# Altium PCB PCB_v1.0.PcbDoc
Units mil, origin at the board's own origin, x right, y up, seen from the top; angles counter-clockwise.
Board outline 3387.01 x 1775 mil, 2 copper layers (Top Layer, Bottom Layer); 30 components, 23 nets, 91 pads, 2 vias.
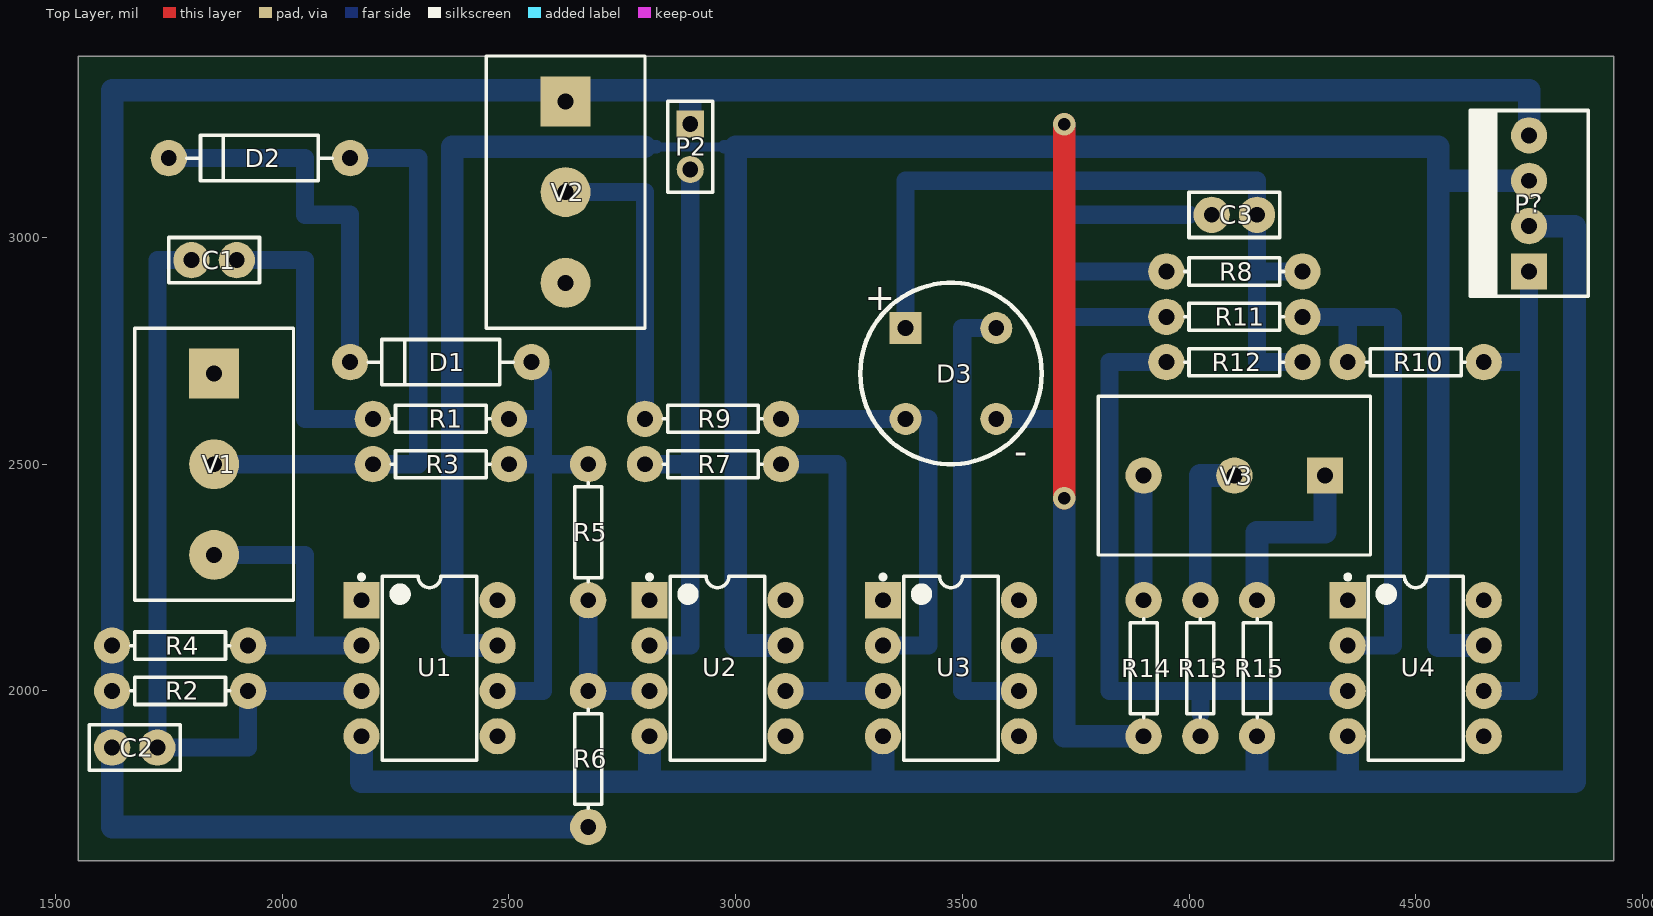
[diagram p0: Top Layer view]
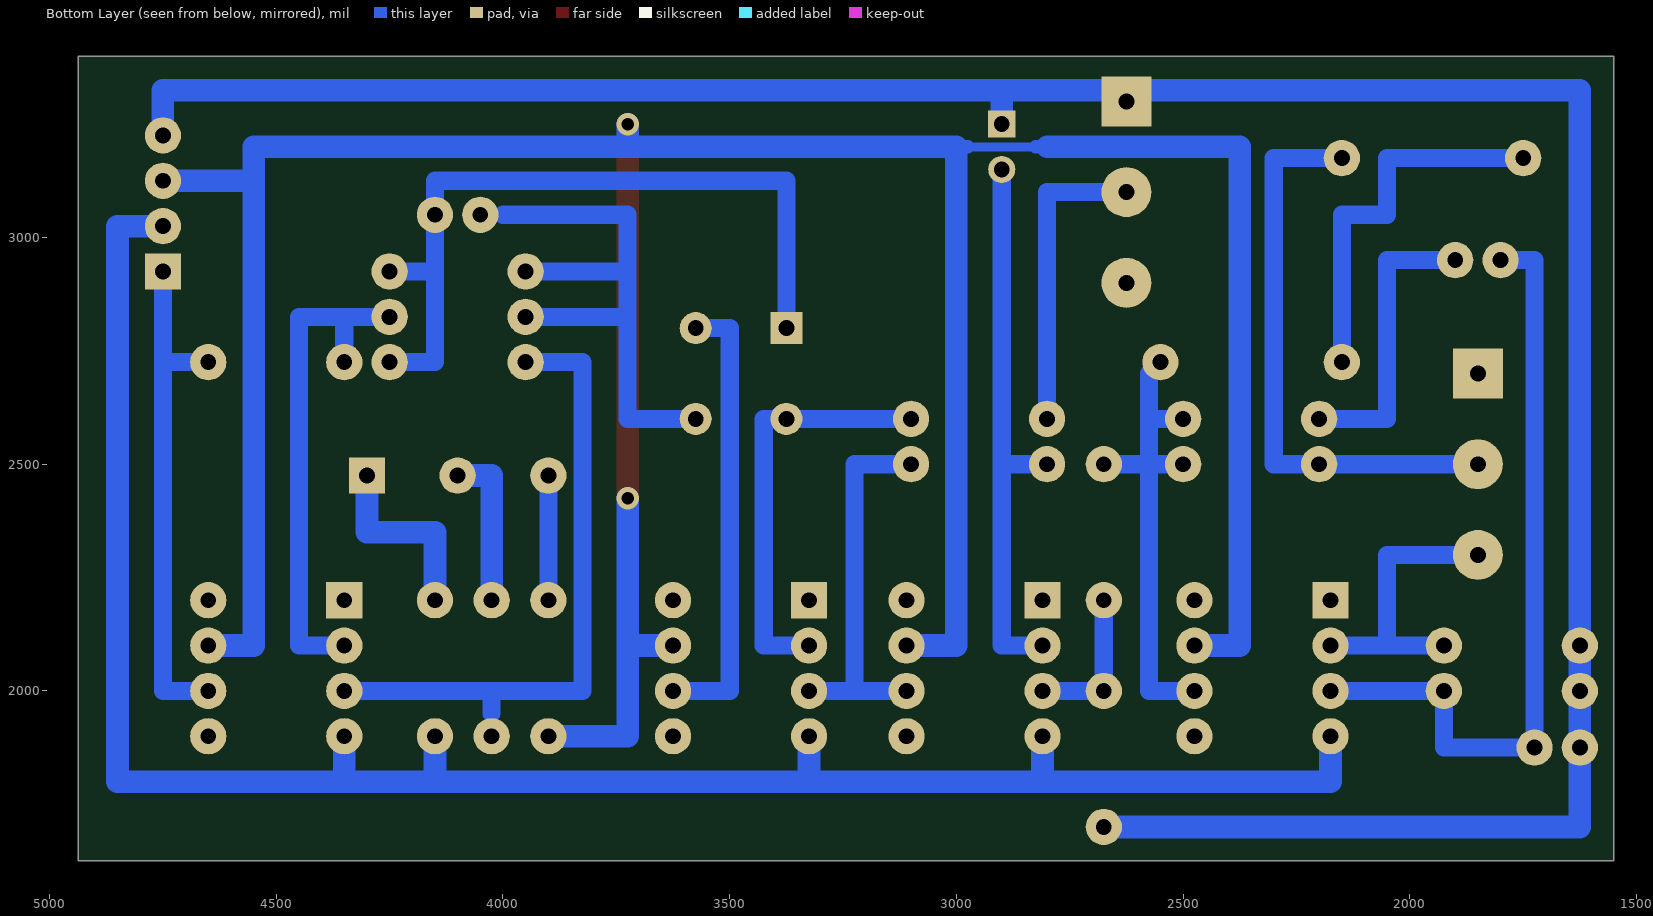
[diagram p1: Bottom Layer view, seen from below]

## Layer stack, top to bottom
Top Solder: solder mask 0.4, Solder Resist, Dk 3.5
Top Layer: signal copper 1.4
Dielectric 1: dielectric 12.6, FR-4, Dk 4.8
Bottom Layer: signal copper 1.4
Bottom Solder: solder mask 0.4, Solder Resist, Dk 3.5

## Board outline
1550,1625 4937.01,1625 4937.01,3400 1550,3400

## Design rules (kind name [scope] priority, off if disabled: settings)
Clearance [All] p1: gap=10 ignorepadtopadclearanceinfootprint=FALSE except(0: Arc-Hole Track-Hole SMDPad-Hole THPad-Hole Via-Hole Fill-Hole Poly-Hole Region-Hole Text-Hole)
PolygonConnect [All] p1: connectstyle=Relief reliefconductorwidth=10 reliefentries=4 polygonreliefangle="90 Angle" airgapwidth=10
RoutingVias [All] p1: holewidth=28 width=50 viastyle="Through Hole" minholewidth=28 minwidth=50 maxholewidth=28 maxwidth=50
SolderMaskExpansion [All] p1: expansion=4
Width [All] p1: maxlimit=80 minlimit=10 preferedwidth=30
30 further rules are at their usual default settings.

## Components (designator, comment, footprint, x,y, rotation, side; value= is the part's Value field where it differs from the comment)
C1 "0.015uF" RAD-0.1 1850,2950 r0 top
C2 "Cap" RAD-0.1 1675,1875 r180 top value=0.015uF
C3 "Cap" RAD-0.1 4100,3050 r0 top value=0.22uF
D1 "1N4733" DIODE-0.4 2350,2725 r180 top
D2 "1N4733" DIODE-0.4 1950,3175 r180 top
D3 "Bridge" BRIDGE_W 3475,2700 r0 top
P2 "Sonda" HDR1X2 2900,3250 r270 top
P? "Header 4" MOLEX4 4750,2925 r90 top
R1 "1.0K" AXIAL-0.3 2350,2600 r0 top
R2 "1.0K" AXIAL-0.3 1775,2000 r180 top
R3 "56K" AXIAL-0.3 2350,2500 r0 top
R4 "33K" AXIAL-0.3 1775,2100 r0 top
R5 "100K" AXIAL-0.3 2675,2350 r270 top
R6 "1.0K" AXIAL-0.3 2675,1850 r270 top
R7 "6.8K" AXIAL-0.3 2950,2500 r0 top
R8 "22K" AXIAL-0.3 4100,2925 r180 top
R9 "1.0K" AXIAL-0.3 2950,2600 r0 top
R10 "220K" AXIAL-0.3 4500,2725 r0 top
R11 "220K" AXIAL-0.3 4100,2825 r0 top
R12 "220K" AXIAL-0.3 4100,2725 r180 top
R13 "100K" AXIAL-0.3 4025,2050 r270 top
R14 "100K" AXIAL-0.3 3900,2050 r270 top
R15 "82K" AXIAL-0.3 4150,2050 r90 top
U1 "TL071" DIP-8 2325,2050 r0 top
U2 "TL071" DIP-8 2960,2050 r0 top
U3 "TL071" DIP-8 3475,2050 r0 top
U4 "TL071" DIP-8 4500,2050 r0 top
V1 "100K" TB-3x200#1 1850,2500 r90 top
V2 "2K" TB-3x200#1 2625,3100 r90 top
V3 "22K" TB-3x200#2 4100,2475 r0 top

## Footprints (in the part's own frame and the unit in brackets; to place one, negate y for a bottom-side part, rotate by r counter-clockwise, add the part's x,y. Pads: shape width x height; smd on the part's side, far side on the other; paste and mask are expansions set on the pad)
AXIAL-0.3 [mil] "Axial Device, Thru-Hole; 2 Leads; 0.3 in Pin Spacing"
  round 80 hole 35: 1(-150,0) 2(150,0)
  silkscreen extent -109,-30 109,30
BRIDGE_W [mm] "Bridge Rectifier; 4 Terminals; Body 10 mm; Pitch 5.08 mm"
  rect 1.8x1.8 hole 0.889: 1(-2.54,2.54)
  round 1.8 hole 0.889: 2(-2.54,-2.54) 3(2.54,-2.54) 4(2.54,2.54)
  silkscreen extent -5.08,-5.08 5.08,5.08, body extent -5.08,-5.08 5.08,5.08, height 2.54
DIODE-0.4 [mil] "Diode, Thru-Hole; 2 Leads; 0.4 in Pin Spacing"
  round 80 hole 35: 1(-200,0) 2(200,0)
  silkscreen extent -160,-50 160,50
DIP-8 [mil] "DIP; 8 Leads; Row Spacing 7.62 mm; Pitch 2.54 mm"
  rect 80x80 hole 35: 1(-150,150)
  round 80 hole 35: 2(-150,50) 3(-150,-50) 4(-150,-150) 5(150,-150) 6(150,-50) 7(150,50) 8(150,150)
  silkscreen extent -155,-203 104,206, body extent -142,-203 142,203, height 200
HDR1X2 [mil] "Connector; Header; 2 Position"
  rect 60x60 hole 35: 1(0,0)
  round 60 hole 35: 2(100,0)
  silkscreen extent -50,-50 150,50
MOLEX4 [mil]
  rect 80x80 hole 35: 1(0,0)
  round 80 hole 35: 2(100,0) 3(200,0) 4(300,0)
  silkscreen extent -55,-130 355,130
RAD-0.1 [mil] "Radial Cap, Thru-Hole; 2 Leads; 0.1 in Pin Spacing"
  round 80 hole 35: 1(-50,0) 2(50,0)
  silkscreen extent -100,-50 100,50
TB-3x200#1 [mil] "Terminal block, 3 positions, 200 mils"
  rect 110x110 hole 35: 1(200,0)
  round 110 hole 35: 2(0,0) 3(-200,0)
  silkscreen extent -300,-175 300,175
TB-3x200#2 [mil] "Terminal block, 3 positions, 200 mils"
  rect 80x80 hole 35: 1(200,0)
  round 80 hole 35: 2(0,0) 3(-200,0)
  silkscreen extent -300,-175 300,175

## Part data
C1: library part Cap, "Cap", Package=0603, Tolerance=±10%, Voltage-Rated=50V
C2 C3: Package=0603, Tolerance=±10%, Voltage-Rated=50V
D1 D2: library part "D Zener", "Zener Diode 3.3v", LatestRevisionDate=17-Jul-2002, LatestRevisionNote="Re-released for DXP Platform.", PackageDescription="Diode, Thru-Hole; 2 Leads; 0.7 in Pin Spacing", PackageReference=DIODE-0.7, Published=8-Jun-2000, Publisher="Altium Limited"
D3: "Full Wave Diode Bridge", DatasheetVersion=E2732B, LatestRevisionDate=29-May-2009, LatestRevisionNote="Sch pins A & K swapped.", PackageDescription="Bridge Rectifier; 4 Terminals; Body 9.4 x 9.4 mm (typ); Pitch 5.08 mm", PackageReference=D-38, Published=8-Jun-2000, Publisher="Altium Limited"
P2: library part "Header 2", "Header, 2-Pin", LatestRevisionDate=17-Jul-2002, LatestRevisionNote="Re-released for DXP Platform.", Publisher="Altium Limited"
P?: "Header, 4-Pin", LatestRevisionDate=17-Jul-2002, LatestRevisionNote="Re-released for DXP Platform.", Publisher="Altium Limited"
R1 R2 R3 R4 R5 R6 R7 R8 R9 R10 R11 R12 R13 R14 R15: library part Res, "Resistor", Package=0603, Tolerance=1%
U1 U2 U3 U4: "Low-noise jfet-input operational amplifiers"
V1 V2 V3: library part Preset, "Potentiometer", LatestRevisionDate=17-Jul-2002, LatestRevisionNote="Re-released for DXP Platform.", PackageDescription="Variable Resistor, Thru-Hole; 3 Leads", PackageReference=VR5, Published=8-Jun-2000, Publisher="Altium Limited", Set Position=0.5, Sim Note="Enter the Resistance value and the set point into parameter fields."

## Via types
v1: diameter 50, hole 28, Top Layer to Bottom Layer, 2 vias

## Nets (pads, with @x,y where several pads share a name; then routed paths per layer and width w, separated by ;. In a path a pad name is that pad's centre, name@x,y a point inside that pad or via, vN(x,y) a via of type N, cw(c..) or ccw(c..) an arc to the next point about the centre after c; other vN are vias at no path point)
+12v: P?.3 R14.2 U1.7 U2.7 U3.7 U4.7 | length 7660
  Top Layer w50: v1(3725,2425) v1(3725,3250)
  Bottom Layer w20: 2825,3200 2975,3200
  Bottom Layer w30: 2800,3200 2825,3200 ; 2975,3200 3000,3200
  Bottom Layer w50: U1.7 2375,2100 2375,3200 2800,3200 ; U2.7 3000,2100 3000,3200 3725,3200 ; U3.7 3725,2100 ; v1(3725,2425) 3725,2100 ; v1(3725,3250) 3725,3200 ; R14.2 3725,1900 3725,2100 ; U4.7 4550,2100 4550,3125 ; P?.3 4550,3125 ; 3725,3200 4550,3200 4550,3125
-12v: P?.2 R15.1 U1.4 U2.4 U3.4 U4.4 | length 4500
  Bottom Layer w50: U1.4 2175,1800 2810,1800 ; U2.4 2810,1800 ; U3.4 3325,1800 ; R15.1 4150,1800 ; U4.4 4350,1800 ; P?.2 4850,3025 4850,1800 4350,1800 ; 2810,1800 3325,1800 ; 3325,1800 4150,1800 ; 4150,1800 4350,1800
GND: C2.2 P2.1 P?.4 R2.2 R4.1 R6.2 V2.1 | length 5975
  Bottom Layer w50: R6.2 1625,1700 C2.2 R2.2 R4.1 1625,3325 2900,3325 ; P2.1 2900,3325 ; P?.4 4750,3325 2900,3325
NetC1_1: C1.1 C2.1 R2.1 U1.3 | length 1700
  Bottom Layer w40: C2.1 1725,2950 C1.1 ; C2.1@1750,1875 1925,1875 R2.1 U1.3
NetC1_2: C1.2 R1.1 | length 625
  Bottom Layer w40: C1.2 2050,2950 2050,2600 R1.1@2175,2600
NetC3_1: C3.1 D3.3 R8.2 R11.1 | length 1325
  Bottom Layer w40: D3.3 3725,2600 3725,2825 ; R11.1 3725,2825 ; R8.2 3725,2925 ; 4000,3050 3725,3050 3725,2925 ; 3725,2825 3725,2925
NetC3_2: C3.2 D3.1 R8.1 R12.1 | length 1700
  Bottom Layer w40: D3.1 3375,3125 3625,3125 4150,3125 C3.2 4150,2925 ; R12.1 4150,2725 4150,2925 ; R8.1 4150,2925
NetD1_1: D1.1 R1.2 R3.2 R5.1 U1.6 | length 1085.4
  Bottom Layer w40: U1.6 2575,2000 2575,2500 ; R3.2 2575,2500 ; R1.2 2575,2600 ; D1.1 2575,2700 2575,2600 ; R5.1 2575,2500 ; 2575,2500 2575,2600
NetD1_2: D1.2 D2.2 | length 850
  Bottom Layer w40: D2.2 2050,3175 2050,3050 2150,3050 D1.2
NetD2_1: D2.1 R3.1 V1.2 | length 1275
  Bottom Layer w40: V1.2 R3.1 2300,2500 2300,3175 D2.1
NetD3_2: D3.2 R9.2 U3.2 | length 925
  Bottom Layer w40: R9.2 D3.2 3425,2600 3425,2100 U3.2
NetD3_4: D3.4 U3.6 | length 1000
  Bottom Layer w40: D3.4 3500,2800 3500,2000 U3.6
NetP2_2: P2.2 R7.1 U2.2 | length 1240
  Bottom Layer w40: R7.1 2900,2500 ; U2.2 2900,2100 2900,2500 ; P2.2 2900,2500
NetP?_1: P?.1 R10.2 U4.6 | length 1125
  Bottom Layer w40: U4.6 4750,2000 4750,2725 ; R10.2 4750,2725 ; P?.1 4750,2725
NetR4_2: R4.2 U1.2 V1.3 | length 650
  Bottom Layer w40: V1.3 2050,2300 2050,2100 ; R4.2 2050,2100 ; U1.2 2050,2100
NetR5_2: R5.2 R6.1 U2.3 | length 310
  Bottom Layer w40: R6.1 U2.3 ; R6.1@2675,2025 R5.2
NetR7_2: R7.2 U2.6 U3.3 | length 840
  Bottom Layer w40: R7.2 3225,2500 3225,2000 ; U2.6 3225,2000 ; U3.3 3225,2000
NetR9_1: R9.1 V2.2 | length 685.4
  Bottom Layer w40: V2.2@2625,3125 2650,3100 2800,3100 R9.1
NetR10_1: R10.1 R11.2 U4.2 | length 1125
  Bottom Layer w40: R11.2 4350,2825 ; U4.2 4450,2100 4450,2825 4350,2825 ; R10.1 4350,2825
NetR12_2: R12.2 R13.2 U4.3 | length 1425
  Bottom Layer w40: R12.2 3825,2725 3825,2000 4025,2000 ; 4025,1950 4025,2000 ; U4.3 4025,2000
NetR13_1: R13.1 V3.2 | length 350
  Bottom Layer w50: R13.1 4025,2475 V3.2
NetR14_1: R14.1 V3.3 | length 275
  Bottom Layer w40: R14.1 V3.3
NetR15_2: R15.2 V3.1 | length 425
  Bottom Layer w50: R15.2 4150,2350 4300,2350 V3.1
pads on no net: U1.1 U1.5 U1.8 U2.1 U2.5 U2.8 U3.1 U3.5 U3.8 U4.1 U4.5 U4.8 V1.1 V2.3

## Silkscreen, mask and mechanical layers (free items; w line width, h text height)
Mechanical 1:
  the board outline again, w10

## Text inside footprints (layer, text, board x,y; h text height)
D3: Top Overlay "-" at 3615,2500 h59.05; Top Overlay "+" at 3285,2840 h59.06